# Altium PCB MasterBoard.PcbDoc (part 2 of 4)
Units mil, origin at the board's own origin, x right, y up, seen from the top; angles counter-clockwise.
Board outline 11195 x 7075 mil, 2 copper layers (Top Layer, Bottom Layer); 563 components, 331 nets, 1395 pads, 369 vias.
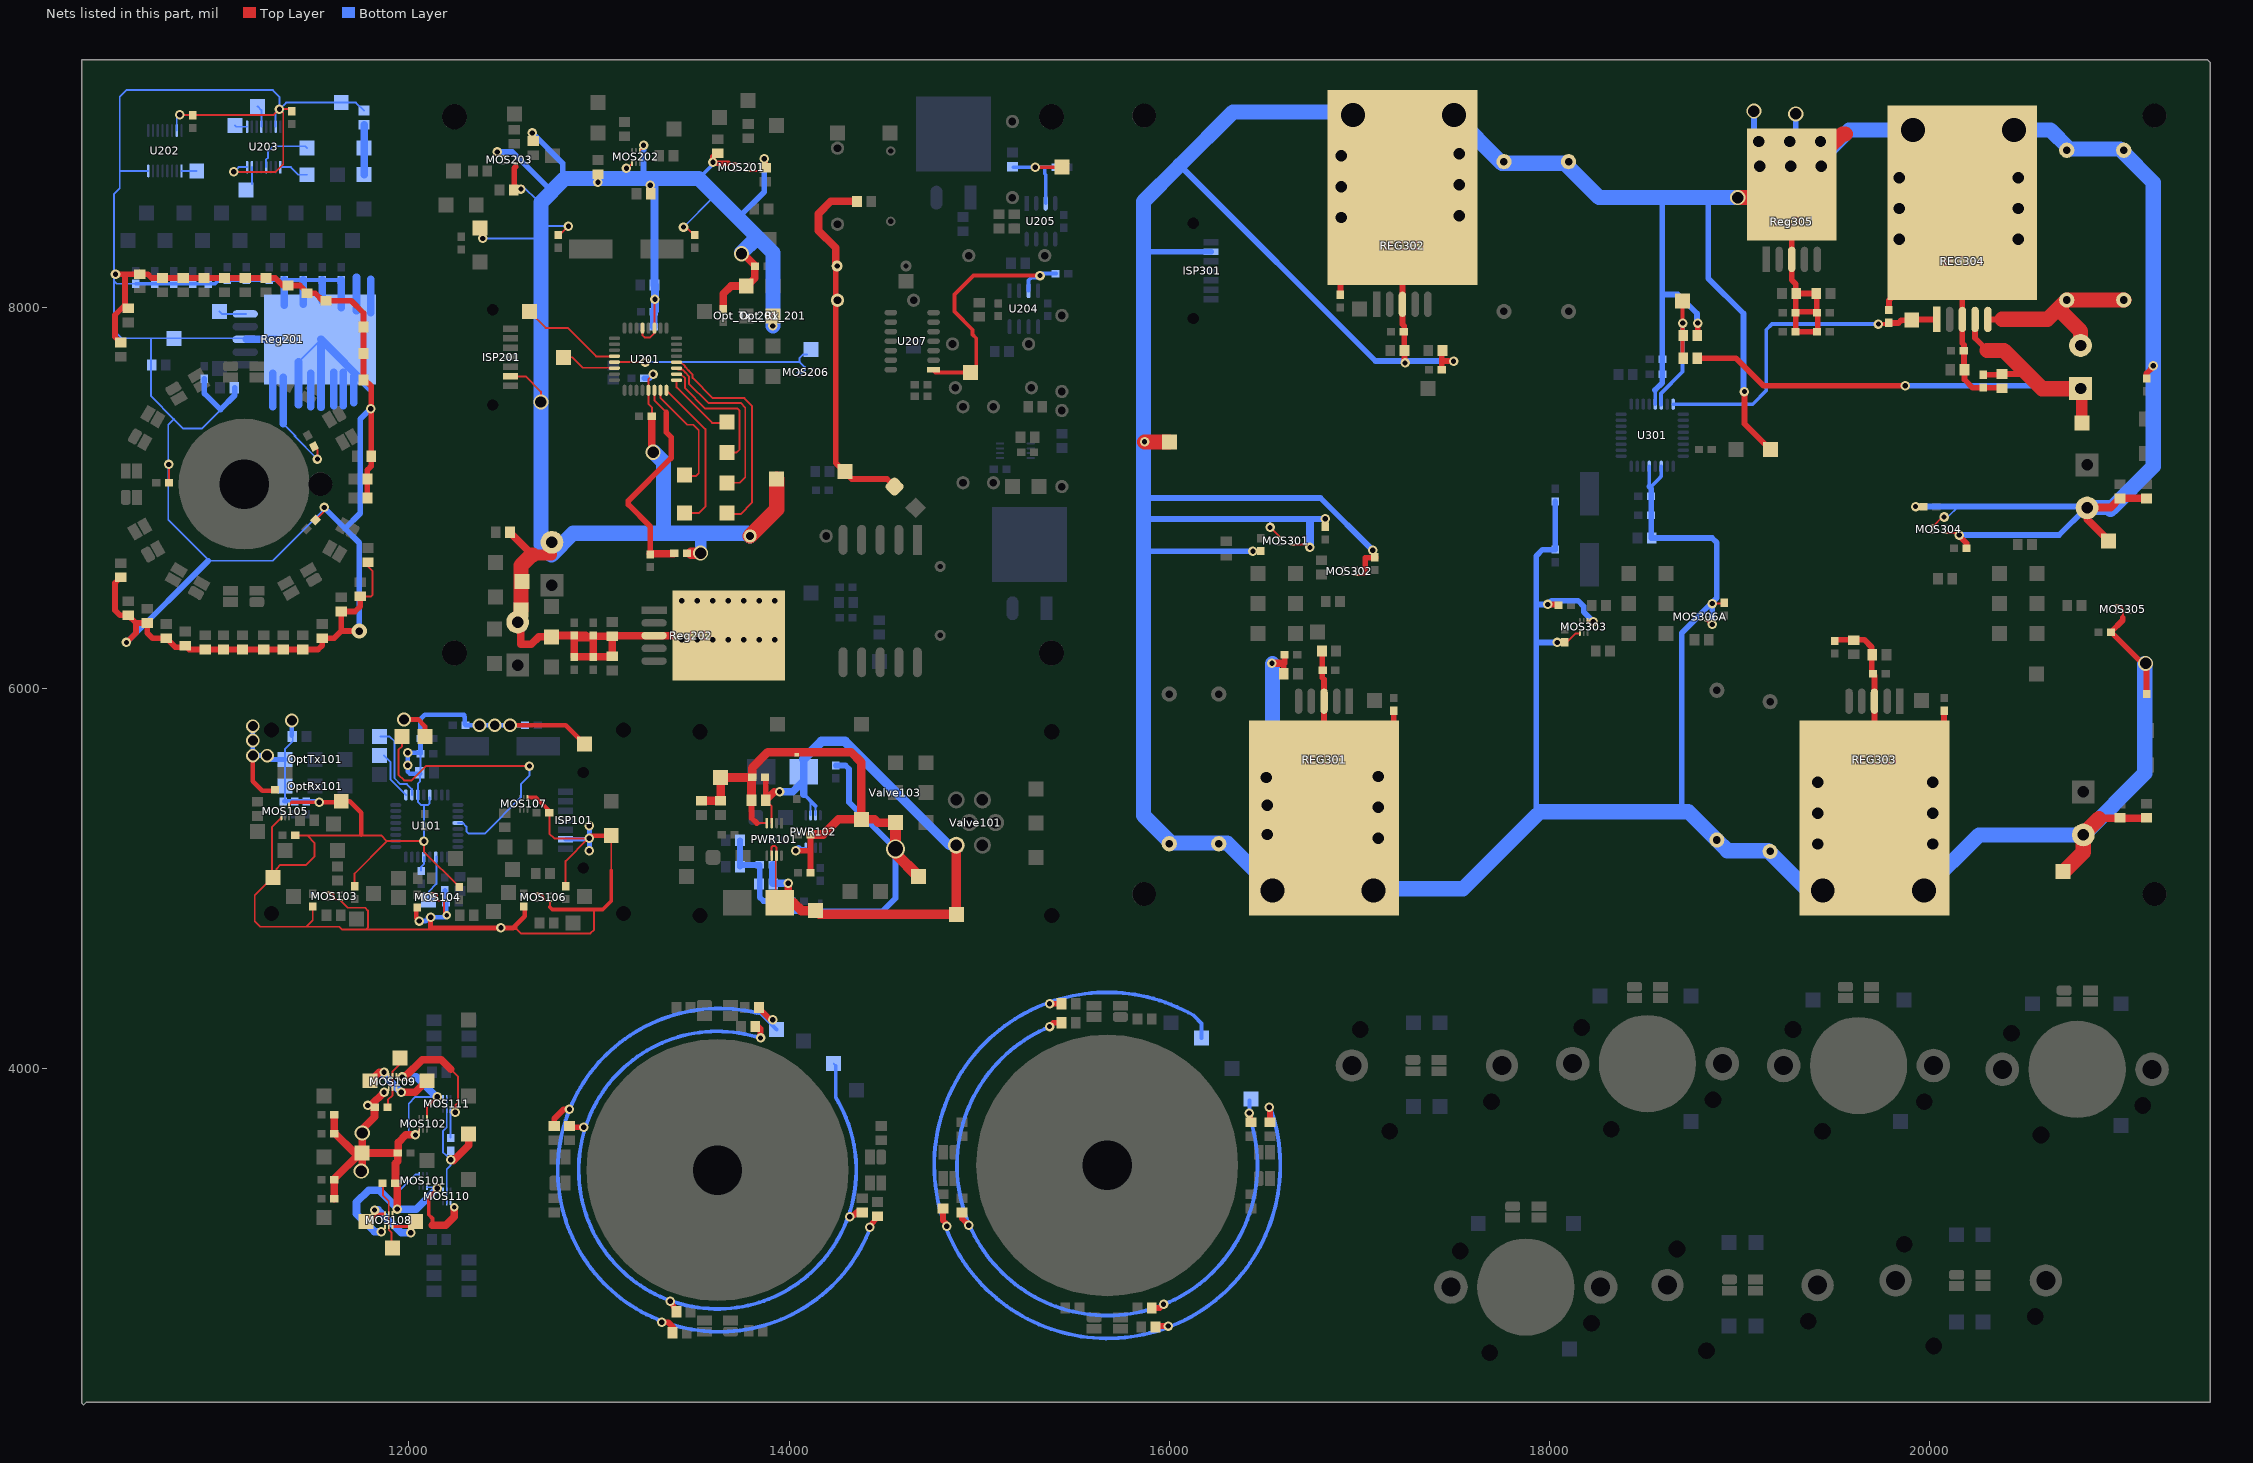
[diagram p2: the nets of this part, all layers, seen from the top]

## Part data
Batt201 Batt301 EL201: library part "Header 2", "Header, 2-Pin"
BT201: "Multicell Battery"
C101 C102 C103 C104 C105 C106 C107 C108 C109 C110 C111 C112 C113 C114 C115 C116 C117 C118 C119 C120 C121 C122 C123 C124 C125 C126 C127 C128 C201 C202 C203 C204 C205 C206 C207 C208 C209 C210 C211 C212 C213 C214 C215 C217 C218 C219 C220 C221 C222 C223 C224 C225 C226 C227 C228 C229 C230 C231 C232 C233 C234 C235 C236 C237 C238 C239 C240 C241 C242 C243 C244 C299 C301 C302 C303 C304 C305 C306 C307 C308 C309 C310 C311 C312 C313 C314 C315 C316 C317 C318 C319 C320 C321 C322 C323 C324 C325 C326 C327 C328 C329 C330 C331 C332 C333: library part "Cap Semi", "Capacitor (Semiconductor SIM Model)"
D101 D102 D201: library part "Diode 10TQ035", "Schottky Rectifier"
I401 I402 I403 I404 I405 I406 I407 I408 I409 I410 I411 I412 I413 I414 I415 I416 I417 I418 I419 I420 I421 I422 I423 I424 I425 I426 I427 I428 I429 I430 I431 I432 I433 I434 I435 I436 I437 I438 I439 I440 I441 I442 I443 I444: library part TestPoint
ISP101 ISP201 ISP301: library part "Header 3X2", "Header, 3-Pin, Dual row"
L101 L102 L103 L201 L301: library part Inductor, "Inductor"
LED109 LED110 LED301 LED302: library part LED0, "Typical INFRARED GaAs LED"
MOS204 MOS205: library part MOSFET-N, "N-Channel MOSFET"
Opt_Rx_201 OptRx101: "Optical receiver module"
Opt_Tx_201 OptTx101: "Optical transmitter"
P301 P302: library part "Header 2H", "Header, 2-Pin, Right Angle"
R101 R102 R103 R104 R108 R109 R110 R111 R112 R113 R114 R117 R119 R120 R121 R125 R126 R127 R128 R135 R136 R137 R138 R139 R140 R141 R142 R143 R144 R145 R146 R147 R148 R149 R150 R151 R152 R153 R201 R202 R203 R204 R205 R206 R207 R208 R209 R210 R244 R245 R260 R261 R262 R263 R263a R263b R264 R265 R266 R267 R268 R269 R270 R271 R272 R273 R274 R277 R302 R304 R305 R310 R312 R319 R320 R321 R325 R326 R327 R331 R332 R333 R334 R335: library part Res3, "Resistor"
R102A R102B R105 R106 R107 R115 R116 R118 R122 R123 R124 R211 R212 R213 R214 R215 R216 R217 R218 R219 R220 R221 R222 R223 R224 R225 R226 R227 R228 R229 R230 R231 R232 R233 R234 R235 R236 R237 R238 R239 R240 R241 R242 R243 R246 R247 R248 R249 R250 R251 R252 R253 R254 R255 R256 R257 R258 R259 R275 R276 R311 R313 R316 R317 R318 R322 R323 R324 R328 R329 R330: "Resistor"
R129 R130 R131 R132 R133 R134 R301 R303 R308 R309 R314 R315 R336 R337: library part Res1, "Resistor"
REG301 REG302 REG303: library part TPS7A4515
REG304: library part TPS7A4501
S101 S205 S301: "Switch"
S201 S204: "12 Way Switch"
S202: library part SW-SPST, "Single-Pole, Single-Throw Switch"
S203: "Single-Pole, Single-Throw Switch"
U101 U201 U301: "8-Bit AVR Microcontroller with 8K Bytes of In-System Programmable Flash Memory"
U202 U203: "ST Quad Bi-Directional Logic Switch"
U207: library part SN54HC04J, "Hex Inverter"
Valve101: library part "Header 3X2H", "Header, 3-Pin, Dual row, Right Angle"
Valve102 Valve103: "Header, 3-Pin, Right Angle"
Valve301 Valve302 Valve303: library part "Header 3X2A", "Header, 3-Pin, Dual row"
Y101 Y201 Y301: "Crystal Oscillator"

## Free pads (board coordinates)
  round 60 hole 80 unplated: 0(11278.58,4814.09) 0(11278.58,5780.24) 0(13128.98,4814.09) 0(13128.98,5780.24) 0(13531.02,4804.76) 0(13531.02,5770.91) 0(15381.42,4804.76) 0(15381.42,5770.91)
  round 132 hole 132 unplated: 0(12240,6185) 0(12240,9005) 0(15380,6185) 0(15380,9005)
  round 1377.95 hole 260: 0(13623.66,3465) 0(15673.66,3490)
  round 125 hole 125 unplated: 0(15868,4917) 0(15868,9011) 0(21182,4917) 0(21182,9011)
  round 170 hole 100: 0(16960,4015) 0(17750,4015) 0(18620,2860) 0(19410,2860) 0(19820,2885) 0(20610,2885)
  round 0 hole 88 unplated: 0(17005,4205) 0(17160,3670) 0(17530,3040) 0(17685,2505) 0(17695,3825) 0(18220,2660) 0(18325,3680) 0(18670,3050) 0(18825,2515) 0(18860,3835) 0(19280,4205) 0(19360,2670) 0(19435,3670) 0(19865,3075) 0(19970,3825) 0(20020,2540) 0(20430,4185) 0(20555,2695) 0(20585,3650) 0(21120,3805)
  round 0 hole 88: 0(18170,4215)

## Via types
v1: diameter 50, hole 28, Top Layer to Bottom Layer, 263 vias
v2: diameter 80, hole 60, Top Layer to Bottom Layer, 55 vias
v3: diameter 44, hole 24, Top Layer to Bottom Layer, 25 vias
v4: diameter 72, hole 52, Top Layer to Bottom Layer, 11 vias
v5: diameter 145, hole 125, Top Layer to Bottom Layer, 8 vias
v6: diameter 60, hole 40, Top Layer to Bottom Layer, 2 vias
v7: diameter 80, hole 40, Top Layer to Bottom Layer, 2 vias
v8: diameter 100, hole 60, Top Layer to Bottom Layer, 1 vias
v9: diameter 100, hole 80, Top Layer to Bottom Layer, 1 vias
v10: diameter 50, hole 28, Top Layer to Bottom Layer, tented top, 1 vias

## Nets (pads, with @x,y where several pads share a name; then routed paths per layer and width w, separated by ;. In a path a pad name is that pad's centre, name@x,y a point inside that pad or via, vN(x,y) a via of type N, cw(c..) or ccw(c..) an arc to the next point about the centre after c; other vN are vias at no path point)
555OSC_201: R269.1 TP224.1 U204.3 U207.1 | length 1395.1
  Top Layer w20: U207.1@14755,7675 14770,7660 14960,7660 14985,7685 14985,7840.5 14965,7860.5 14965,7885 14870,7980 14870,8070 14970,8170 v1(15320,8170)
  Bottom Layer w20: U204.3@15260,8090 U204.3@15260,8125 ; U204.3@15260,8115 15260,8145 15275,8160 15310,8160 15330,8180 15375,8180 R269.1@15405,8180
ACOSC_201: R262.2 R270.1 TP219.1 U205.3 | length 558.6
  Top Layer w20: v1(15295,8740) TP219.1@15435,8740
  Bottom Layer w20: R262.2@15180,8740 v1(15295,8740) R270.1@15401.54,8740 ; 15345,8720 15345,8740 ; 15345,8725 15345,8705 15350,8700 15350,8595 U205.3@15350,8550
B_CONTROL_101: I141.1 I142.1 MOS109.3 MOS109.6 | length 397.8
  Top Layer w40: I141.1@11795,3930 11797.5,3932.5 11845,3980 v1(11870,3980) ; v1(11960,3875) 12035,3875 I142.1@12095,3935
  Bottom Layer w40: v1(11870,3980) 11870,3965 v1(11960,3875)
B_CONTROL_101L: I116.1 R101.1 R140.1 R142.1 R144.1 | length 5497.7
  Top Layer w10: v1@15375,4345 v1@15380,4340
  Top Layer w30: R142.1@14810,3266.54 14810,3200 v1@14830,3180 ; v1@15380,4340 R101.1@15436.54,4340 ; R140.1@15930,2645 v1(15995,2645) ; R144.1@16530,3717.4 v1@16530,3780
  Bottom Layer w20: I116.1@16170,4160 16170,4236.89 16129.01,4277.88 ccw(c15673.66,3490) v1@16530.8,3795.63
  other v1: 14830,3170 16525,3795 15370,4340
B_CONTROL_101R: I118.1 R146.1 R148.1 R150.1 R152.1 | length 4499.1
  Top Layer w30: R150.1@12845,3690 v1(12920,3690) ; v1(13375,2775) R152.1@13411.54,2720 ; R148.1@13838.46,4220 13850,4208.46 v1@13850,4178.98 ; v1@14337.64,3225 14359.17,3246.54 R146.1@14385,3246.54
  Bottom Layer w10: I118.1@14235,4025 I118.1@14245.87,4014.13
  Bottom Layer w20: v1@13851.26,4158.61 ccw(c13623.66,3465) 14245.87,3846.78 I118.1@14245.87,4014.13
  other v1: 14320,3220 13850,4160
B_PWM_101: I132.1 U101.2 | length 424.4
  Bottom Layer w10: I132.1@11850,5745 11900,5745 11925,5720 11925,5526.43 11956.43,5495 11990,5495 12016.26,5468.74 U101.2@12016.26,5438.39
B_PWM_101A: I146.1 MOS109.2 MOS109.5 R109.2 | length 281.9
  Top Layer w10: R109.2@11885,3795 11886.73,3796.73 11890,3800 11890,3835 11915,3860 MOS109.2@11915,3895 MOS109.5@11915,3961.93 11915,3985 11950,4020 I146.1@11950,4050
BATT+301: Batt301.1 C315.2 C316.2 R311.2 REG304.4 TP307.1 | length 3222.5
  Top Layer w30: R311.2@18777.4,7735 18980,7735 19125,7590 v1(19870,7590) ; REG304.4@20238.07,7938.94 20238.07,7841.93 20280,7800 20280,7775 ; C315.2@20280,7648.46 C316.2@20380,7648.46 ; C316.2@20380,7652.4 20492.4,7652.4 ; Batt301.1@20790,7575 20790.91,7574.09 Batt301.1@20795,7570
  Top Layer w60: TP307.1@20800,7395 Batt301.1@20800,7565
  Top Layer w80: 20300,7775 20390,7775 20590,7575 Batt301.1@20790,7575
  Bottom Layer w30: v1(19870,7590) 20775,7590 Batt301.1@20790,7575
BATT-301: Batt301.2 R336.2 R337.2 REG304.5 | length 965.2
  Top Layer w30: REG304.5@20305,7938.94 20373.94,7938.94
  Top Layer w80: 20380,7940 20618.7,7940 R337.2@20720,8041.3 ; 20690,7980 20792.76,7877.24 Batt301.2@20792.76,7801.93 ; R337.2@20726.3,8041.3 R336.2@21020,8041.3
BATTEN301: R335.2 REG304.1 TP309.1 U301.24 | length 1753.5
  Top Layer w20: v1(19730,7915) 19775,7915 R335.2@19780,7920
  Top Layer w30: R335.2@19780,7920 19785,7920 19835,7920 19850,7935 TP309.1@19905,7935 ; TP309.1@19908.94,7938.94 REG304.1@20037.28,7938.94
  Bottom Layer w20: U301.24@18650.24,7493.39 19068.39,7493.39 19140,7565 19140,7885 19170,7915 v1(19730,7915)
BATTERY_SENSE_201: R263.2 R274.1 U201.22 | length 1156.2
  Top Layer w10: U201.22@13292.24,7566.61 13292.24,7512.76 13355,7450
  Top Layer w30: R263.2@13270,6710 13270,6850 13155,6965 13155,6985 13380,7210 13380,7320 13355,7345 13355,7450
  Top Layer w40: R263.2@13270,6707.4 R274.1@13392.4,6707.4
BATTERYSENSE_101: I103.1 U101.19 | length 246.6
  Bottom Layer w10: I103.1@12105,4885 12105,4930 12145,4970 12145,5111.61 U101.19@12145,5115
BATTERYSENSE_101B: C110.2 C111.2 C114.2 C115.2 I106.1 L102.1 L103.1 PWR101.3 PWR101.6 PWR101.7 PWR102.6 PWR102.7 TP117.1 Valve101.6 | length 3948.6
  Top Layer w10: C110.2@13877.4,5410 13908.82,5378.58 PWR101.3@13908.82,5290 ; PWR101.6@13908.82,5118.74 13908.82,5163.82 13915,5170 13925,5170 13934.41,5160.59 PWR101.7@13934.41,5118.74 13930,5114.33 13930,4892.2 L102.1@13952.2,4870 L102.1@14025,4870 ; 13922.4,5455 v1(13950,5455)
  Top Layer w30: C110.2@13877.4,5410 C111.2@13877.4,5526.06
  Top Layer w40: C110.2@13877.4,5410 13922.4,5455 ; L102.1@13952.2,4870 13996.06,4913.86 v1(13996.06,4973.94) ; TP117.1@14140,4830 TP117.1@14160,4810 ; Valve101.6@14879.45,5173.54 Valve101.6@14880,5172.99
  Top Layer w50: L102.1@14025,4870 14065,4830 TP117.1@14140,4830 ; TP117.1@14160,4810 I106.1@14880,4810 Valve101.6@14880,5172.99
  Bottom Layer w10: PWR102.6@14113.82,5331.26 14113.82,5404.03 ; PWR102.7@14139.41,5331.26 14139.41,5380.59
  Bottom Layer w20: 14077.2,5442.8 14139.41,5380.59
  Bottom Layer w40: C115.2@13913.46,5070 13913.46,4973.94 13917.4,4973.94 v1(13996.06,4973.94) ; v1(13950,5455) 14020,5455 L103.1@14077.2,5512.2 ; 14077.2,5442.8 L103.1@14077.2,5512.2 ; 14077.2,5627.2 L103.1@14077.2,5560 L103.1@14077.2,5512.2 ; Valve101.6@14841.46,5173.54 Valve101.6@14879.45,5173.54
  Bottom Layer w50: 14077.2,5627.2 14170,5720 14295,5720 Valve101.6@14841.46,5173.54
BATTSENSE301: R311.1 R313.2 TP308.1 U301.22 | length 774.4
  Top Layer w20: TP308.1@18700,8030 v1(18700,7920) 18700,7855 18700,7740 18703.8,7736.2 R311.1@18705,7735
  Bottom Layer w20: U301.22@18585.75,7490 18585.75,7493.39 18585.75,7549.32 18700,7663.57 v1(18700,7920)
COLOUR_EN_201: I216.1 U201.14 | length 287.8
  Top Layer w10: I216.1@12815,7740 12860,7740 12915,7685 U201.14@13080,7685
COLOUR_EN_201A: I212.1 Reg201.5 | length 145.1
  Bottom Layer w10: I212.1@11005,7980 11017.28,7967.72 Reg201.5@11145,7967.72
DATA201: I222.1 U201.25 | length 382.1
  Top Layer w10: U201.25@13408.39,7619.76 13408.39,7581.61 13595,7395 I222.1@13675,7395
DATA201A: I205.1 U203.4 | length 307.1
  Bottom Layer w10: U203.4@11250,8740 11250,8780.5 11260,8790.5 11260,8822.33 11287.67,8850 11455,8850 I205.1@11465,8840
DATA202: I221.1 U201.26 | length 718.1
  Top Layer w10: U201.26@13408.39,7651.26 13431.71,7651.26 13452.91,7630.05 13452.91,7577.09 13560,7470 13730,7470 13740,7460 13740,7255 13725,7240 I221.1@13675,7240
DATA202A: I206.1 U203.7 | length 90
  Bottom Layer w10: I206.1@11175,8650 U203.7@11175,8740
DATA203: I202.1 U201.27 | length 938.2
  Top Layer w10: U201.27@13408.39,7682.76 13415.04,7676.1 13438.36,7676.1 13452.91,7661.55 13452.91,7660.52 13472.91,7640.52 13472.91,7602.09 13575,7500 13745,7500 13770,7475 13770,7110 13740,7080 I202.1@13680,7080
DATA203A: I207.1 U203.9 | length 68.1
  Bottom Layer w10: I207.1@11085,8960 11092.4,8952.6 U203.9@11150,8952.6
DATA204: I220.1 U201.28 | length 1163.7
  Top Layer w10: U201.28@13408.39,7714.25 13431.71,7714.25 13452.91,7693.05 13452.91,7689.83 13472.91,7669.83 13472.91,7668.8 13492.91,7648.8 13492.91,7632.09 13600,7525 13765,7525 13805,7485 13805,6975 13745,6915 I220.1@13680,6915
DATA204A: I208.1 U203.12 | length 115.7
  Bottom Layer w10: I208.1@11205,9060 11225,9040 U203.12@11225,8952.6
DATA_SELECT_201: I215.1 U201.23 | length 618.8
  Top Layer w10: U201.23@13323.74,7566.61 13323.74,7526.26 13465,7385 13495,7385 13525,7355 13525,7130 13510,7115 I215.1@13450,7115
DATA_SELECT_201A: I203.1 U202.1 | length 80
  Bottom Layer w10: U202.1@10805,8720 I203.1@10885,8720
DATA_SELECT_202: I218.1 U201.24 | length 825.9
  Top Layer w10: U201.24@13355.24,7566.61 13560,7361.85 13560,6955 13525,6920 I218.1@13450,6920 I218.1@13445,6920
DATA_SELECT_202A: I204.1 U203.1 | length 156.6
  Bottom Layer w10: U203.1@11325,8740 11380,8740 11420,8700 I204.1@11465,8700
EL_CONTROL_201: MOS206.2 TP225.1 U201.13 | length 1141.7
  Top Layer w10: U201.13@13081.61,7714.25 v1@13245,7714.25
  Bottom Layer w10: v1(13245,7715) 14055,7715 ; MOS206.2@14045,7660 MOS206.2@14055,7660 14072.06,7660 14083.78,7671.72 14083.78,7688.28 14057.06,7715 14055,7715 ; TP225.1@14095,7755 14075,7755 14055,7735 14055,7715
G_CONTROL_101: I110.1 I138.1 MOS108.3 MOS108.6 | length 469.9
  Top Layer w15: I110.1@11775,3195 11795,3195 11835,3235 MOS108.3@11872.5,3235 ; 11920,3168.07 12003.07,3168.07 I138.1@12030,3195
  Bottom Layer w40: v1(11820,3255) 11840,3255 11960,3135 v1@12005,3135
  other v1: 12010,3135
G_CONTROL_101L: I112.1 R139.1 R141.1 R143.1 R145.1 | length 4043.2
  Top Layer w10: v1(15370,4220) 15390,4240
  Top Layer w20: v1(16420,3765) 16430,3755 R145.1@16430,3717.4
  Top Layer w30: R143.1@14910,3246.54 14910,3210 v1(14945,3175) ; 15390,4240 R139.1@15436.54,4240 ; R141.1@15905,2740 15950,2740 v1(15970,2760)
  Bottom Layer w20: v1@15370.25,4219.41 ccw(c15673.66,3490) 16421.27,3745.31 16421.27,3765 I112.1@16421.27,3831.27
G_CONTROL_101R: I114.1 R147.1 R149.1 R151.1 R153.1 | length 4458.7
  Top Layer w30: R151.1@12765,3695 12765,3735 12815,3785 v1(12845,3785) ; v1@13335,2665 13365,2665 13391.54,2638.46 R153.1@13391.54,2600 ; R149.1@13838.46,4320 13898.46,4260 v1@13915,4260 ; v1(14425,3165) 14425,3166.54 R147.1@14470,3225
  Bottom Layer w20: 13860,4280 13880,4260 I114.1@13935,4205 ; 13861.09,4283.94 ccw(c13633.4,3465) v1@14428.64,3164.85
  other v1: 13330,2665 13915,4255
G_PWM_101: I131.1 U101.1 | length 254.2
  Bottom Layer w10: I131.1@11870,5645 11905,5610 11905,5518.15 U101.1@11984.76,5438.39
G_PWM_101A: I105.1 MOS108.2 MOS108.5 R108.2 | length 363.6
  Top Layer w10: R108.2@11865,3395 11865,3330 11895,3300 MOS108.2@11895,3235 MOS108.5@11895,3168.07 11895,3151.01 11910,3136.01 11910,3055 I105.1@11910,3050
GND101: C101.1 C102.1 C103.1 C104.1 C105.1 C106.1 C107.1 C108.1 C109.1 C126.1 C127.1 C128.1 I104.1 ISP101.6 MOS103.1 MOS103.4 MOS104.1 MOS104.4 MOS105.1 MOS105.4 MOS106.1 MOS106.4 MOS107.1 OptRx101.3 OptTx101.3 R112.1 R113.1 R114.1 R119.1 R120.1 R121.1 R125.1 R126.1 R127.1 S101.2 TP121.1 TP122.1 TP123.1 U101.3 U101.5 U101.21 | length 11585.5
  Top Layer w10: TP123.1@11280,5025 11280,5268.07 MOS105.4@11330,5318.07 ; MOS105.1@11370,5385 11385,5400 ; R119.1@11400,5225 R119.1@11403.46,5225 11465,5225 ; R113.1@11495,4851.54 11495,4780 11460,4745 ; MOS103.1@11575,4925 11595,4925 11603.78,4916.22 11603.78,4901.22 11620,4885 11640,4885 11680,4845 11770,4845 11785,4830 11785,4740 11775,4730 ; R121.1@11715,4960 11715,5025 11885,5195 ; MOS104.4@12115,4920 MOS104.4@12118.07,4920 12140,4920 12150,4910 12150,4890 12160,4880 MOS104.1@12185,4880 12185,4815 v3@12200,4800 ; 12130,4730 11775,4730 ; R114.1@12265,4955 12080,5140 v1(12080,5195) 11885,5195 ; 12560,4740 12590,4710 12955,4710 12975,4730 12975,4830 ; MOS106.1@12675,4920 12692.06,4920 12710,4902.06 12710,4894.87 12724.87,4880 MOS106.4@12741.93,4880 ; R126.1@12740,5345 12740,5235 12765,5210 v1@12945,5210 ; 12741.93,4848.07 MOS106.4@12741.93,4880 ; MOS106.4@12745,4880 MOS106.4@12741.93,4880 ; R125.1@12825,4958.46 12825,5090 v1@12945,5210 ; v1(12950,5210) v1@12945,5210 ; v1@12950,5215 v1@12945,5210 ; 13065,5045 S101.2@13065,5210 ; 11460,4745 11635,4745 11650,4730 11775,4730 ; 11460,4745 11220,4745 11190,4775 11190,4910 TP123.1@11285,5005 11305,5025 11305,5050 11325,5070 11460,5070 11505,5115 11505,5185 11465,5225 ; 11465,5225 11855,5225 11885,5195
  Top Layer w20: 11385,5400 v1(11530,5400) ; 12635,5425 12670,5425 12738.46,5356.54 R126.1@12738.46,5345 ; 12741.93,4848.07 12755,4835 13020,4835 13065,4880 13065,5040
  Top Layer w25: v4(11180,5645) 11180,5510 11230,5460 R120.1@11290,5460 ; v1(11530,5400) I104.1@11655,5400 ; I104.1@11645,5405 11690,5405 11750,5345 11750,5230 ; v4(11975,5835) 12050,5835 12085,5800 TP122.1@12085,5745 TP122.1@12085,5740 ; R112.1@12040,4840 12040,4790 v1(12055,4775) ; v1(12115,4795) 12115,4740 12116.87,4738.13 12548.13,4738.13 12550,4740 ; v1(12485,4740) 12550,4740 ; v4@12535,5805 12825,5805 TP121.1@12925,5705 ; 12560,4740 12550,4740 ; R127.1@12610,4850 12610,4800 12550,4740 ; v1@12958.9,5223.9 S101.2@13065,5223.9
  Bottom Layer w10: C127.1@11345,5405 11350.04,5410.04 OptRx101.3@11350.04,5485 11350.04,5614.96 11350,5615 OptTx101.3@11350.04,5625 11350,5680 11390,5720 C126.1@11390,5740 ; 11995,5560 12005,5550 ; v1(11995,5660) v1@11995,5665 ; C104.1@12060,5540 12060,5510 12047.76,5497.76 U101.3@12047.76,5438.39 12047.76,5402.24 12065,5385 12080,5385 ; C104.1@12061.54,5561.54 C106.1@12061.54,5655 ; C107.1@12065,5040 12065,5060 12079.25,5074.25 U101.21@12079.25,5111.61 ; U101.21@12080,5130 v1(12080,5195) 12080,5385 ; U101.5@12110,5425 12110,5395 12100,5385 12080,5385 ; C128.1@12190,4870 C128.1@12195,4865 ; v4(12372.5,5805) v4@12375,5805 ; v1@12950,5140 v1(12950,5145) ; v1@12950,5205 v1(12950,5210)
  Bottom Layer w25: v4(11180,5800) v4(11180,5725) v4(11180,5645) v4(11255,5645) ; v4@11260,5645 11280,5625 OptTx101.3@11350.04,5625 ; C127.1@11345,5405 C102.1@11455,5405 ; C126.1@11385,5750 v4(11385,5830) ; C102.1@11460,5403.46 v1@11525,5403.46 ; v4@11985,5835 12060,5835 12085,5860 ; 11995,5560 v1(11995,5595) v1(11995,5660) C106.1@12050,5660 ; 12005,5550 C104.1@12060,5550 ; v1(12055,4775) 12090,4775 v1@12110,4795 ; C106.1@12061.54,5655 C105.1@12061.54,5733.46 ; C105.1@12061.54,5735 12061.54,5826.54 ; 12090,5860 12285,5860 ; v1@12100,4795 v1@12110,4795 ; C128.1@12190,4870 C108.1@12190,4936.54 ; C128.1@12196.54,4870 12196.54,4801.54 12190,4795 v1(12115,4795) v1@12110,4795 ; 12290,5860 12285,5860 ; C101.1@12295,5810 12295,5850 12285,5860 ; C101.1@12298.46,5805 v4(12372.5,5805) ; v4@12378.46,5805 v4(12452.5,5805) v4(12532.5,5805) C103.1@12610,5805 ; ISP101.6@12825,5205 12950,5205 v1(12950,5145) ; v1(12950,5210) v1(12950,5275)
  other v3: 12200,4805
GND101A: C122.1 C123.1 C124.1 C125.1 I148.1 MOS101.1 MOS101.4 MOS102.1 MOS102.4 MOS108.1 MOS108.4 MOS109.1 MOS109.4 MOS110.1 MOS110.4 MOS111.1 MOS111.4 R108.1 R109.1 R110.1 R111.1 | length 4535.8
  Top Layer w10: v1(12035,3650) 12035,3655 MOS102.1@12055,3675 ; MOS102.4@12095,3741.93 12095,3795 v1(12150,3850) ; 12220,3995 12260,3955 12260,3820.5 12245,3805.5 v1(12245,3770)
  Top Layer w20: 12125,3175 12125,3210 12105,3230 12105,3320 v1@12145,3360
  Top Layer w40: C124.1@11608.46,3315 C122.1@11608.46,3415 11608.46,3418.46 I148.1@11745,3555 ; C125.1@11608.46,3755 11608.46,3661.54 11715,3555 ; v2@11755,3460 I148.1@11755,3555 ; v1@11790,3805 11800,3805 v1(11870,3875) ; R109.1@11820,3795 11820,3745 11755,3680 v2(11755,3660) I148.1@11755,3555 ; R108.1@11928.46,3395 11940,3383.46 v1(11940,3260) ; R108.1@11930,3405 11930,3500 11941.54,3511.54 R110.1@11941.54,3555 ; v1@11965,3960 11985,3960 12070,4045 12170,4045 12220,3995 ; v1(12035,3650) 11985,3650 11945,3610 11945,3560 11940,3555 I148.1@11755,3555 ; 12125,3175 12195,3175 12240,3220 v3(12240,3270)
  Bottom Layer w10: v1(11940,3260) 11945,3265 11945,3350 12036.93,3441.93 MOS101.4@12055,3441.93 ; v1@12020,3650 12000,3670 12000,3815 12035,3850 12145,3850 v1(12150,3850) ; MOS101.1@12095,3375 12140,3375 v1@12145,3370 ; R111.1@12220,3635 MOS111.1@12220,3780
  Bottom Layer w40: v1(11855,3140) 11820,3140 11725,3235 11725,3295 11790,3360 11845,3360 11940,3265 v1(11940,3260) ; v1@11945,3260 12040,3260 v1(12150,3370) ; v1(11965,3955) 12040,3955 v1@12145,3850
  other v1: 11785,3805
  other v2: 11750,3460
GND101B: C110.1 C111.1 C112.1 C113.1 C114.1 C115.1 C116.1 C117.1 C118.1 C119.1 C120.1 C121.1 I122.1 I151.1 PWR101.4 PWR102.4 R132.1 R134.1 TP124.1 Valve103.1 | length 4893
  Top Layer w10: 13830,5290 PWR101.4@13876.34,5290
  Top Layer w30: C110.1@13802.6,5410 13802.6,5317.4 13830,5290 ; v1(14035,5145) 14108.46,5145 ; C118.1@14113.46,5030 R132.1@14113.46,5230
  Top Layer w45: C113.1@13540,5407.4 C112.1@13640,5407.4 TP124.1@13640,5530 C111.1@13806.54,5530 13806.54,5581.54 13888.46,5663.46 14040,5663.46 14326.54,5663.46 14380,5610 I122.1@14380,5310 ; C110.1@13802.6,5410 C111.1@13802.6,5526.06 ; R132.1@14113.46,5230 14180,5230 14260,5310 I122.1@14380,5310 ; Valve103.1@14560,5292.52 14467.48,5292.52 14450,5310 I122.1@14380,5310
  Top Layer w60: v9(14560,5155) Valve103.1@14560,5292.52 ; v9@14560,5160 14560,5130 I151.1@14680,5010
  Bottom Layer w10: v1(14035,5145) 14050,5160 PWR102.4@14088.23,5160
  Bottom Layer w30: C116.1@13742.4,5060 C117.1@13742.4,5200 ; C116.1@13752.4,5070 C115.1@13846.54,5070 13846.54,4970 13846.54,4898.46 13865,4880 R134.1@14011.54,4880 14011.54,4843.46 14028.46,4826.54 14165,4826.54 14491.54,4826.54 14560,4895 v9(14560,5155) 14315,5400 14315,5575 14296.54,5593.46 C120.1@14245,5593.46 ; v1@14040,5150 v1@14050,5160
GND201: Batt201.2 BT201.2 C203.1 C204.1 C205.1 C206.1 C207.1 C208.1 C209.1 C210.1 C214.1 C223.1 C224.1 C225.1 C226.1 C227.1 C228.1 I217.1 I234.1 I235.1 ISP201.6 L205.2 MOS201.1 MOS201.4 MOS202.1 MOS202.4 MOS203.1 MOS203.4 Opt_Rx_201.2 Opt_Tx_201.3 R249.1 R250.1 R251.1 R252.2 R256.1 R257.1 R258.1 R274.2 Reg202.3 Reg202.6 S205.2 TP227.1 U201.3 U201.5 U201.21 | length 13267.8
  Top Layer w10: ISP201.6@12535,7640 12615,7640 12695,7560 v2(12695,7505) ; R257.1@12555,8640 v1@12600,8640 ; 12561.93,8741.93 MOS203.4@12561.93,8760 ; C204.1@12795,8385 v1(12840,8430) ; v1@13150,8735 MOS202.1@13175,8760 ; MOS202.4@13215,8826.93 13235,8846.93 v1(13235,8855) ; U201.5@13229.25,7893.39 13229.25,7855.75 13240,7845 13270,7845 13295,7870 U201.3@13295,7890 ; U201.21@13260,7570 13260,7566.61 13260,7495 13278.46,7476.54 C208.1@13278.46,7430 ; U201.21@13260.75,7566.61 13260.75,7625.75 v1(13285,7650) ; v1(13270,8645) v1@13270,8665 ; U201.3@13292.24,7893.39 13292.24,8042.24 v1(13295,8045) ; v1@13460,8425 C203.1@13500,8385 ; v2(13535,6710) v2@13540,6710 ; 13680,8760 MOS201.1@13715,8760 ; MOS201.4@13781.93,8720 R250.1@13865,8720
  Top Layer w30: R257.1@12555,8640 12555,8735 12561.93,8741.93 ; R258.1@12650,8875 v1(12650,8920) ; v1(12995,8660) R256.1@12995,8706.54 ; R251.1@13268.46,8600 v1@13268.46,8638.46 ; v1@13600,8760 13680,8760 ; v1(13600,8765) 13600,8795 R249.1@13625,8820 ; v1(13870,8785) 13875,8780 R250.1@13875,8733.46
  Top Layer w40: R252.2@12532.4,6820 12652.4,6700 ; Batt201.2@12585,6350 12590,6345 12590,6230 12645,6230 12685,6270 I234.1@12750,6270 I234.1@12755,6270 ; I234.1@12756.54,6276.54 C228.1@12870,6276.54 12930,6276.54 ; C228.1@12865,6270 12870,6270 12925,6270 ; C227.1@12960,6265 12930,6265 ; C227.1@12967.6,6272.6 12970,6272.6 C226.1@13070,6272.6 C225.1@13070,6167.4 13070,6165 C224.1@12970,6165 ; C226.1@13070,6276.14 Reg202.3@13290,6276.14 13435,6276.14 Reg202.6@13451.14,6276.14 ; v2@13278.46,7246.54 C208.1@13278.46,7430 ; C214.1@13655,7993.46 13655,8075 13695,8115 Opt_Tx_201.3@13775,8114.96 13780,8115 13820,8155 13820,8220 13820,8225 v2@13760,8285 ; 12925,6270 12930,6275 12930,6270 ; 12925,6270 12930,6270 ; 12930,6265 12930,6270 ; 12930,6265 12870,6265 12870,6165 C224.1@12970,6165 ; 12930,6270 12965,6270 12970,6265 C224.1@12970,6165
  Top Layer w60: 12652.4,6700 12750,6700 BT201.2@12750,6750 ; R274.2@13485,6710 v2(13535,6710)
  Top Layer w80: I217.1@12590,6410 12590,6645 12645,6700 12652.4,6700 ; L205.2@13797.5,6802.5 L205.2@13795,6800 13935,6940 TP227.1@13935,7100
  Bottom Layer w10: v1(12390,8365) 12680,8365 12685,8370 ; v1@12600,8640 12680,8560 ; 12695,8430 v1(12840,8430) ; v1(13445,8425) 13600,8580
  Bottom Layer w20: 13525,8680 v1@13600,8755
  Bottom Layer w30: v1(12465,8820) 12545,8820 12740,8625 ; v1(12650,8920) 12810,8760 12810,8690 ; 13235,8685 v1(13235,8855) ; C209.1@13238.46,7630 13265,7630 v1(13285,7650) ; 13740,8480 13870,8610 v1(13870,8785)
  Bottom Layer w40: C207.1@13288.46,7900 C206.1@13288.46,7980 C206.1@13288.46,7983.46 ; C206.1@13290,7980 13295,7985 v1(13295,8045) C205.1@13295,8120 ; C205.1@13292.4,8120 v1@13292.4,8645
  Bottom Layer w60: v2(13535,6710) 13535,6810
  Bottom Layer w80: v2@13290,7240 13340,7190 13340,6815 ; v2@13750,8290 13820,8360 ; L205.2@13795,6800 13780,6815 13340,6815 ; v1(13915,7905) 13915,8290 13525,8680 13270,8680 13145,8680 12995,8680 12820,8680 12695,8555 12695,8430 v2(12695,7505) 12695,6755 12750,6700 12865,6815 13340,6815
  other v1: 13435,6255 13516.67,6255 13598.33,6255 13680,6255 13761.67,6255 13843.33,6255 13925,6255 13435,6460 13516.67,6460 13598.33,6460 13680,6460 13761.67,6460 13843.33,6460 13925,6460 12590,8625 13145,8735
  other v2: 13285,7240 13750,8285
GND201A: C201.1 C202.1 C212.2 C215.1 C239.2 C240.1 C241.1 C244.2 I210.1 I214.1 R201.2 R202.1 R203.2 R204.1 R205.2 R206.1 R207.2 R208.1 R209.2 R210.1 R211.1 R212.1 R213.1 R214.1 R215.1 R216.1 R217.1 R218.1 R219.1 R220.1 R221.1 R222.1 R223.1 R224.1 R225.1 R226.1 R227.1 R228.1 R229.1 R230.1 R231.1 R232.1 R233.1 R234.1 R235.1 R236.1 R237.1 R238.1 R239.1 R240.1 R241.1 R242.1 R243.1 R244.1 R245.2 R259.2 Reg201.3 Reg201.6 U202.8 U202.15 U203.8 U203.15 | length 20021.8
  Top Layer w10: C241.1@10738.46,7080 v1(10738.46,7176.54) ; v1(10795,9015) C215.1@10863.46,9015 ; C215.1@10865,9013.46 11288.46,9013.46 v1(11320,9045) ; v1(11080,8715) 11300,8715 11340,8755 11340,9025 v1(11320,9045) ; C212.2@11373.46,9045 v1(11320,9045) ; C202.1@11501.73,7271.02 11520,7252.75 v1(11520,7205) ; C240.1@11508.66,6883.66 v1@11555,6930 ; R212.1@11745,6482.6 11802.6,6482.6 11810,6490 11810,6615 11785,6640 R213.1@11785,6662.6 ; R238.1@11762.4,7620 R238.1@11770,7620
  Top Layer w30: v1(10457.6,8177.4) 10507.4,8177.4 ; R223.1@10485,6582.6 10455,6552.6 10455,6410 10482.4,6382.6 R224.1@10525,6382.6 10565,6342.6 ; R228.1@10485,7817.4 10455,7847.4 10455,7962.6 10507.4,8015 10507.4,8177.4 ; v1(10515,6240) 10565,6290 10565,6342.6 ; v7(11740,6300) 11645,6300 ; R212.1@11745,6482.6 11745,6430 11717.6,6402.6 R211.1@11645,6402.6 11645,6300 ; R238.1@11762.4,7620 R239.1@11762.4,7760 R240.1@11762.4,7900 11762.4,7972.6 11697.6,8037.4 R235.1@11565,8037.4 11547.6,8037.4 11507.6,8077.4 R236.1@11465,8077.4 11465,8080 11427.6,8117.4 R237.1@11365,8117.4 11337.6,8117.4 11297.6,8157.4 R232.1@11248.75,8157.4 R233.1@11140,8157.4 R234.1@11031.25,8157.4 R229.1@10922.5,8157.4 R230.1@10813.75,8157.4 R231.1@10705,8157.4 10647.6,8157.4 10627.6,8177.4 R226.1@10585,8177.4 10507.4,8177.4 ; R238.1@11770,7620 11802.4,7587.6 11802.4,7470 R242.1@11802.4,7220 11802.4,7167.4 11782.4,7147.4 R241.1@11782.4,7100 R243.1@11782.4,7000 ; 10565,6342.6 R225.1@10625,6342.6 10625,6290 10652.4,6262.6 R220.1@10725,6262.6 10772.6,6215 10825,6215 10832.6,6215 10845,6202.6 R222.1@10930,6202.6 R217.1@11025,6202.6 R218.1@11125,6202.6 R219.1@11237.5,6202.6 R214.1@11340,6202.6 R215.1@11442.5,6202.6 11522.6,6202.6 11545,6225 R216.1@11545,6262.6 11607.6,6262.6 11645,6300
  Bottom Layer w10: v1@10450,8177.4 10450,8140 ; v1@10450,8180 10450,8600 10480,8630 10480,8720 ; R201.2@10565,8126.54 10463.46,8126.54 10450,8140 ; U202.8@10630,8720 10480,8720 ; U202.15@10780,8932.6 10780,9000 v1(10795,9015) ; 11010,7465 10910,7365 10815,7365 10765,7415 ; v1(11080,8715) 11105,8740 U203.8@11150,8740 ; Reg201.3@11145,7833.86 11138.86,7840 I214.1@10765,7840 10645,7840 ; U203.15@11300,8952.6 11300,9025 v1(11320,9045) ; 11340,7390 11405,7325 ; 11397.5,7327.5 v1(11520,7205) ; Reg201.6@11420,7715.16 11538.7,7833.86 11538.7,7811.3 Reg201.6@11710,7640 ; v1@11555,6940 11285,6670 10950,6670 10735,6885 10735,7176.54 10735,7385 10765,7415 ; R259.2@11765,9037.4 11722.4,9080 I210.1@11645,9080 11355,9080 v1(11320,9045) ; v1@11795,7470 11795,7577.56 ; 10450,8140 10450,7880 10490,7840 10645,7840 ; 10480,8720 10480,9110 10515,9145 11285,9145 11320,9110 v1(11320,9045) ; 10645,7840 10645,7700 10645,7535 10765,7415
  Bottom Layer w20: R201.2@10565,8126.54 R203.2@10665,8126.54 R205.2@10765,8126.54 R207.2@10865,8126.54 R209.2@10945,8126.54 10981.54,8126.54 11001.54,8146.54 R202.1@11045,8146.54 R204.1@11145,8146.54 R206.1@11265,8146.54 R208.1@11345,8146.54 R210.1@11445,8146.54 R244.1@11545,8146.54 R245.2@11645,8146.54
  Bottom Layer w30: v1@10455,8180 v1(10457.6,8177.4) ; v1(10515,6240) 10945,6670 ; C239.2@10925,7626.54 10925,7550 11010,7465 11085,7540 C244.2@11085,7580 ; v1(11555,6950) 11665,6840 ; v7(11740,6300) 11740,6765 11665,6840 ; v1(11800,7470) 11745,7415 11745,6920 11665,6840
  Bottom Layer w40: Reg201.3@11145,7833.86 Reg201.6@11303.86,7833.86 ; 11285,7480 Reg201.6@11285,7655 ; 11340,7390 Reg201.6@11340,7635.16 ; Reg201.6@11345,8015 R208.1@11345,8146.54 ; 11420,7490 Reg201.6@11420,7715.16 ; Reg201.6@11445,8020 R210.1@11445,8146.54 ; 11485,7480 Reg201.6@11485,7655 ; 11538.7,7476.3 Reg201.6@11538.7,7811.3 ; Reg201.6@11538.7,7833.86 11795,7577.56 ; Reg201.6@11545,8035 R244.1@11545,8146.54 ; 11605,7485 Reg201.6@11605,7660 ; Reg201.6@11645,8000 R245.2@11645,8146.54 ; 11655,7485 Reg201.6@11655,7660 ; 11710,7500 Reg201.6@11710,7640 ; Reg201.6@11725,7985 11725,8160 ; Reg201.6@11800,7975 11800,8150
GND301: C301.1 C302.1 C303.1 C304.1 C305.1 C306.1 C307.1 C308.1 C309.1 C310.1 C311.1 C312.1 C313.1 C314.1 C315.1 C316.1 C317.1 C318.1 C319.1 C320.1 C321.1 C322.1 C323.1 C324.1 C325.1 C326.1 C327.1 C328.1 C329.1 C330.1 C331.1 C332.1 C333.1 ISP301.6 MOS301.1 MOS301.4 MOS302.1 MOS303.1 MOS303.4 MOS304.1 MOS304.4 MOS305.1 MOS306A.4 P301.2 P302.2 R301.2 R302.1 R303.2 R304.1 R305.1 R308.2 R309.2 R310.1 R312.1 R313.1 R314.1 R315.1 R319.1 R320.1 R321.1 R325.1 R326.1 R327.1 R331.1 R332.1 R333.1 R335.1 R336.1 R337.1 REG301.3 REG301.6 REG302.3 REG302.6 REG303.3 REG303.6 REG304.3 REG304.6 Reg305.3 Reg305.6 S301.2 TP319.1 TP320.1 TP321.1 U301.3 U301.5 U301.21 | length 40313.2
  Top Layer w10: v1(16530,6845) MOS301.1@16580,6795 ; MOS301.4@16646.93,6755 16730,6755 16742.5,6742.5 v10@16745,6740 ; MOS302.1@16980,6595 17020,6595 17030,6605 ; R326.1@18090,6240 18138.07,6288.07 MOS303.4@18160,6288.07 ; MOS303.1@18200,6355 18225,6355 v1(18230,6350) ; MOS306A.4@18826.93,6355 18846.93,6335 v1(18855,6335) ; v1(18855,6445) R325.1@18920,6445 ; MOS304.4@20013.07,6855 20020,6855 v1@20065,6900 ; MOS304.1@20080,6815 20145,6815 v1(20155,6805) v1@20145,6810 ; MOS305.1@20980,6435 21000,6435 21015,6420 21015,6370
  Top Layer w30: R319.1@16475,6720 R319.1@16480,6720 ; C304.1@16602.6,6075 16602.6,6127.4 ; 16606.54,6131.54 C303.1@16606.54,6175 ; C302.1@16800,6195 16801.3,6193.7 16805,6190 16805,6095 16805,6055 16813.86,6046.14 REG301.3@16813.86,5931.06 REG301.6@16813.86,5741.14 ; R310.1@16900,8068.46 REG302.6@16900,8180 ; 17030,6605 17030,6685 17070,6685 17080,6685 17085,6685 17085,6688.46 R321.1@17085,6690 ; REG301.6@17180,5820 R302.1@17180,5881.54 ; REG302.6@17226.14,8163.86 REG302.3@17226.14,8018.94 17226.14,7913.86 17235,7905 17235,7875 C306.1@17235,7780 ; v1@17237.4,7712.6 C306.1@17237.4,7775 ; C307.1@17433.46,7675 C308.1@17433.46,7773.46 ; 17440,7720 v1(17495,7720) ; v1(17990,6440) R327.1@18045,6440 ; R313.1@18775,7860 18780,7865 v1(18780,7920) ; v1(19025,7560) 19025,7390 S301.2@19155,7260 ; Reg305.6@19273.86,8573.86 Reg305.3@19273.86,8255 19273.86,8146.14 19295,8125 19295,8075 C327.1@19295,8070 ; C325.1@19400,7980 19300,7980 C328.1@19295,7975 ; C311.1@19505,6255 19600,6255 19655,6255 19695,6215 19695,6175 19695,6080 19700.77,6074.23 19708.86,6066.14 REG303.3@19708.86,5931.06 REG303.6@19708.86,5806.14 ; R335.1@19785,7988.46 19785,8040 REG304.6@19865,8120 ; REG303.6@20075,5820 R312.1@20075,5881.54 ; v1@20155,6800 20193.46,6761.54 R331.1@20193.46,6735 ; REG304.6@20171.14,8103.86 REG304.3@20171.14,7938.94 20171.14,7813.86 20180,7805 20180,7775 20180,7680 20183.7,7676.3 C314.1@20185,7675 ; C314.1@20182.4,7675 20182.4,7622.6 20225,7580 20280,7580 20380,7580 C316.1@20385,7580 ; 21015,6370 21015,6356.54 R333.1@20953.46,6295 v2@21118.46,6130 ; R305.1@21140,5968.46 v2@21140,6125 ; R304.1@21140,7628.46 21140,7655 21177.5,7692.5 v1@21180,7695 ; C328.1@19295,7975 19295,7875 C324.1@19406.54,7875 19410,7875 19410,7965 19405,7970 19405,7975 19405,8075 C326.1@19402.6,8075 19300,8075 19298.7,8073.7 C327.1@19295,8070 ; C328.1@19295,7975 C327.1@19295,8070
  Top Layer w40: v1(16540,6130) 16595,6130 ; P301.2@20825,6950 20827.24,6950 20952.4,6950 C330.1@21000,6997.6 ; P301.2@20827.24,6948.07 20827.24,6887.76 TP320.1@20940,6775 ; 20890,5315 21000,5315 C333.1@21137.4,5315 ; C330.1@21007.6,6997.6 C331.1@21140,6997.6
  Top Layer w80: v1(15870,7295) TP321.1@16000,7295 ; v2(18990,8580) 19205,8580 19273.78,8648.78 19318.75,8693.75 19400,8775 19462.5,8837.5 19540,8915 19555,8915 ; TP319.1@20705,5035 20807.24,5137.24 P302.2@20807.24,5228.07 ; P302.2@20810,5235 20890,5315
  Bottom Layer w10: v1(16530,6845) 16530,6885 ; v1(20075,6900) 20095,6900 20150,6955
  Bottom Layer w20: 18524.25,7060.75 U301.5@18524.25,7166.61 ; 18540,7065 18583.74,7108.74 18583.74,7110.76 18587.24,7114.26 U301.3@18587.24,7166.61 ; U301.21@18555.75,7495 U301.21@18555.75,7493.39 18555.75,7559.25
  Bottom Layer w30: 15865,7005 15870,7000 16795,7000 v1(17070,6725) ; 15865,8295 ISP301.6@16220,8295 ; 15870,6890 v1(16820,6890) ; 15875,6720 v1(16440,6720) ; 16055,8760 16055,8750 17085,7720 17240,7720 v1(17495,7720) ; 17930,5330 17930,6240 ; C317.1@18030,6728.46 17963.46,6728.46 17930,6695 17930,6440 ; C317.1@18030,6730 C318.1@18030,6981.54 ; v1(18040,6240) 17930,6240 ; v1(18230,6350) 18180,6400 18180,6430 18150,6460 18010,6460 v1(17990,6440) 17930,6440 ; 18524.25,7060.75 18535,7050 18535,7010 18535,6910 C319.1@18535,6790 ; C319.1@18537.4,6790 18855,6790 18880,6765 18880,6475 18852.5,6447.5 18695,6290 18695,5350 ; 18555,7568.07 18593.46,7606.54 C322.1@18593.46,7650 C323.1@18593.46,7730 18593.46,8070 ; 18593.46,8576.54 18593.46,8070 ; v1@18775,7920 18775,7970 18675,8070 18593.46,8070 ; 18835,8560 18835,8155 19020,7970 v1@19020,7565 ; v1(18855,6335) v1(18855,6445) ; v2(19075,9035) 19075,8905 v2@19105,8875 ; v2@19265,8875 19295,8905 v2(19295,9020) ; v1(19925,6955) 20150,6955 20810,6955 P301.2@20820,6945 ; v1(20155,6805) 20680,6805 P301.2@20820,6945 ; P301.2@20825,6950 P301.2@20820,6945 ; 17930,6240 17930,6440
  Bottom Layer w40: v10(16740,6740) 16740,6885
  Bottom Layer w80: v1@16542.2,6127.8 16542.2,5530 16542.2,5385 16542.2,5230 16542.2,4947.8 16305,5185 16260,5185 16010,5185 16006.85,5188.15 15865,5330 15865,7005 15865,7295 15865,8295 15865,8560 16055,8750 16335,9030 16966.3,9030 17480,9030 17496.4,9013.6 17750,8760 17760,8760 R309.2@18080,8760 ; v5@17073.7,4945 17545,4945 17930,5330 ; 17950,5350 18695,5350 18730,5350 18879.35,5200.65 18935,5145 19150,5145 19156.85,5138.15 19355,4940 19437.2,4940 19968.7,4940 19970,4940 20258.07,5228.07 P302.2@20807.24,5228.07 21130,5550.83 v2@21130,6130 ; R309.2@18085.65,8754.35 18260,8580 v2(18990,8580) 19220,8580 19407.5,8767.5 19470,8830 19555,8915 ; 19575,8935 v5(19911.3,8935) ; v5(20442.8,8935) 20635,8935 R337.1@20730.65,8839.35 ; R337.1@20735,8835 21000,8835 21013.15,8821.85 21175,8660 v1(21175,7695) 21175,7165 20955,6945 ; P301.2@20820,6950 20825,6950 20827.24,6950 20940,6950 20950,6940
  other v1: 17240,7710
  other v2: 19410,5180 20015,5180 17100,5210 16515,5230 19410,5342.5 20015,5342.5 17100,5372.5 16515,5385 19410,5505 20015,5505 16510,5530 17100,5535 21135,6130 19840,8360 20465,8360 16905,8475 17525,8485 19840,8522.5 20465,8522.5 16905,8637.5 17525,8647.5 19840,8685 20465,8685 19105,8745 19267.5,8745 19430,8745 16905,8800 17525,8810 19100,8875 19262.5,8875 19425,8875
  other v5: 16542.2,4935 17073.7,4935 19437.2,4935 19968.7,4935 16966.3,9015 17497.8,9015
HEADLIGHT_201: I219.1 U201.12 | length 542.3
  Top Layer w10: I219.1@12635,7980 12720,7895 12835,7895 12985,7745 U201.12@13080,7745
HEADLIGHT_201A: I213.1 R259.1 S203.2 | length 261.5
  Bottom Layer w40: S203.2@11765,8701.1 I213.1@11765,8840 R259.1@11765,8962.6
HEADLIGHTENABLE_101: I130.1 U101.12 | length 1572.7
  Top Layer w10: I130.1@11965,5745 11965,5695 11945,5675 11945,5545 11975,5515 12015,5515 12090,5590 v1(12635,5590)
  Bottom Layer w10: U101.12@12258.39,5290.75 12284.25,5290.75 12302.91,5272.09 12302.91,5246.63 12313.28,5236.26 12401.26,5236.26 12590,5425 12590,5495 12635,5540 v1(12635,5590)
HEADLIGHTENABLE_101A: I149.1 MOS110.2 MOS110.5 MOS111.2 MOS111.5 R111.2 | length 763.2
  Top Layer w40: v1@12235,3515 12315,3595 I149.1@12315,3655
  Bottom Layer w10: MOS110.5@12200,3290 MOS110.5@12200,3293.07 MOS110.2@12200,3360 12200,3470 12220,3490 v1(12220,3520) 12196.73,3543.27 12180,3560 12180,3670 12200,3690 MOS111.2@12200,3780 MOS111.5@12200,3846.93
HVDC_201: C213.2 D201.1 R264.2 R273.1 TP217.1 | length 2023.6
  Top Layer w30: 14245,8300 14245,7320 14245,7185 14330,7100 14485,7100 14515,7100 D201.1@14555,7060
  Top Layer w40: C213.2@14245,8215 14245,8315 14155,8405 14155,8495 14220,8560 R273.1@14357.6,8560